# Altium PCB Boost-Shield-V2.PcbDoc
Units mil, origin at the board's own origin, x right, y up, seen from the top; angles counter-clockwise.
Board outline 1250 x 825 mil, 2 copper layers (Top Layer, Bottom Layer); 31 components, 24 nets, 87 pads, 42 vias.
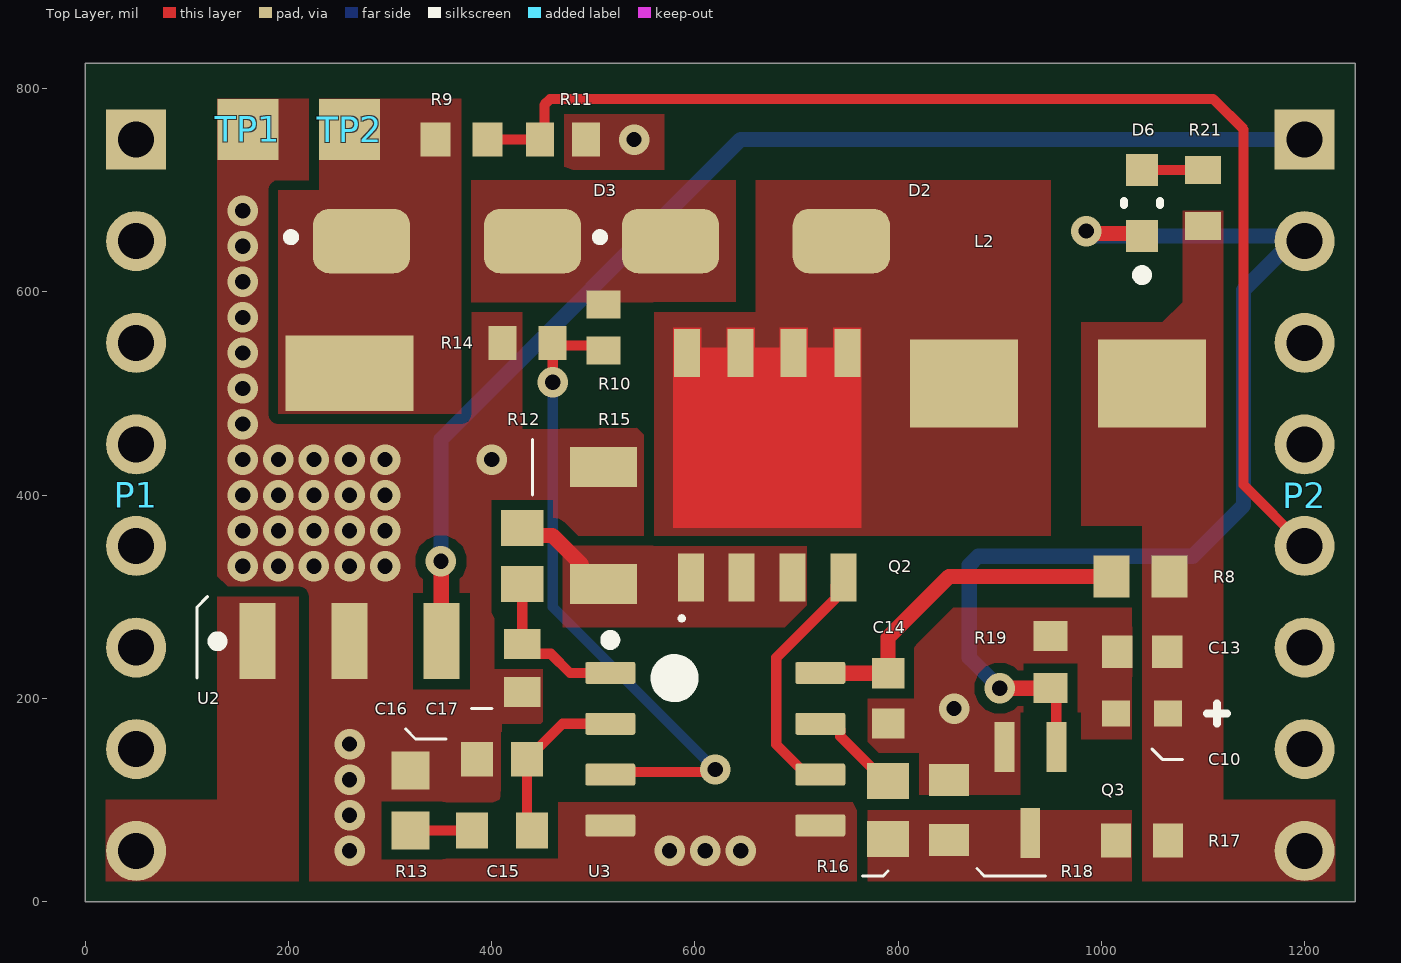
[diagram p0: Top Layer view]
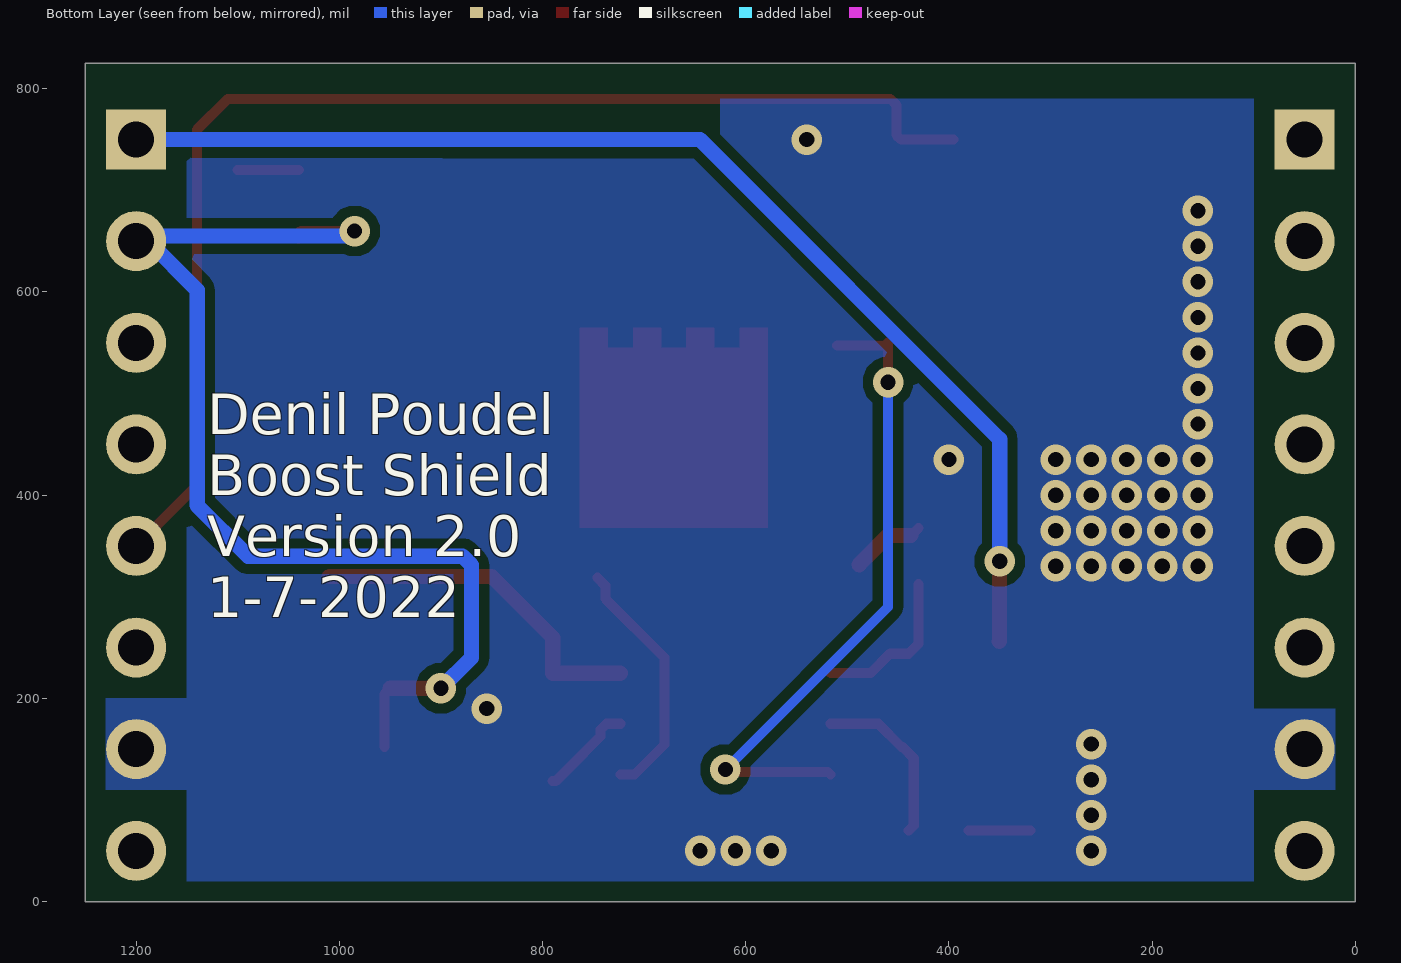
[diagram p1: Bottom Layer view, seen from below]
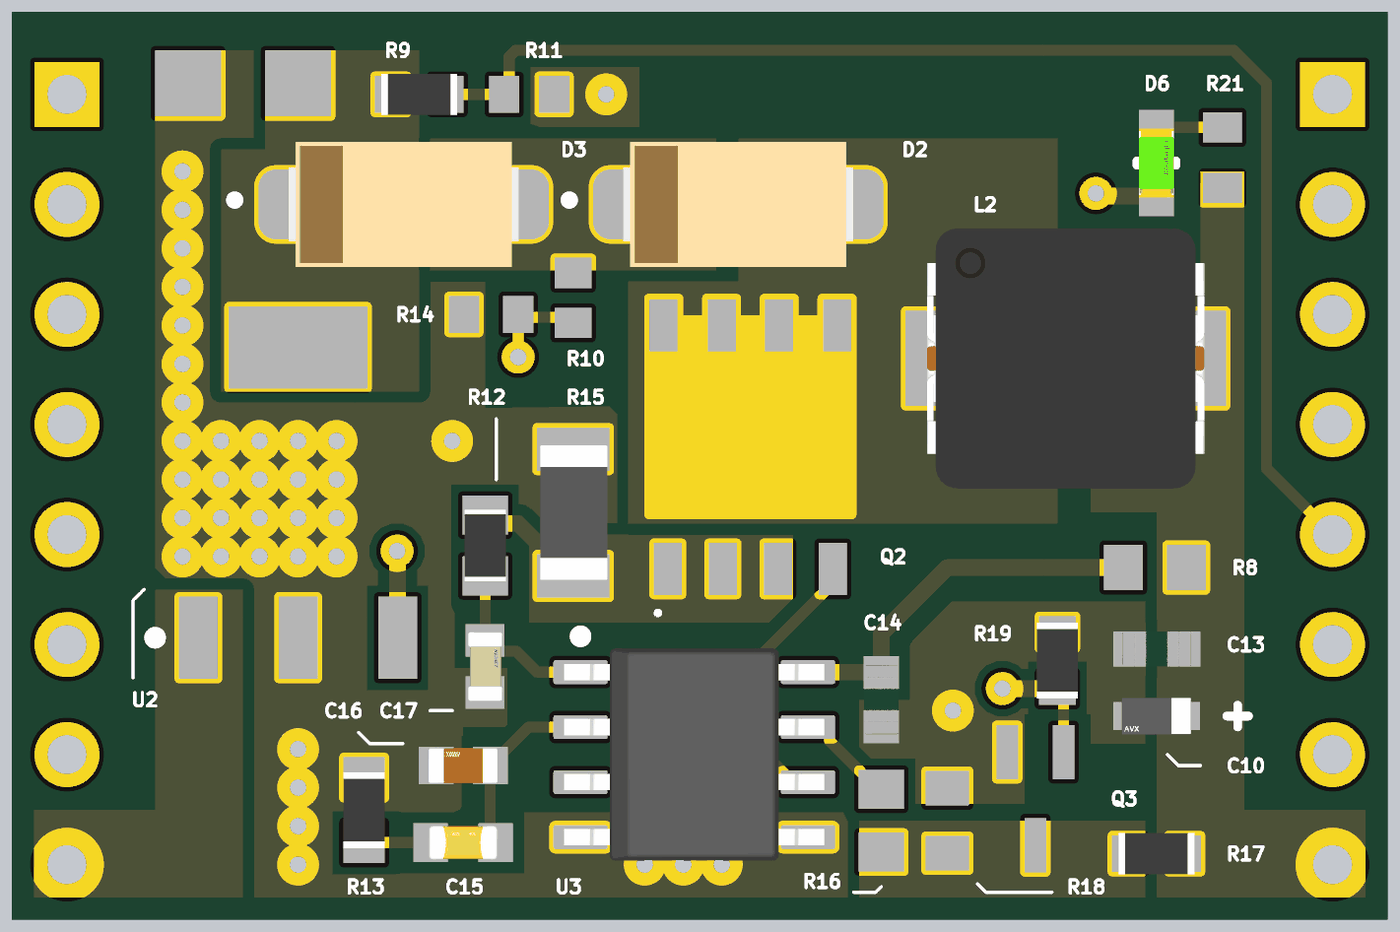
[diagram p2: 3D render of the assembled board from above, using the file's embedded part models]

## Layer stack, top to bottom
Top Solder: solder mask 0.4, Solder Resist, Dk 3.5
Top Layer: signal copper 1.4
Dielectric 1: dielectric 12.6, FR-4, Dk 4.8
Bottom Layer: signal copper 1.4
Bottom Solder: solder mask 0.4, Solder Resist, Dk 3.5

## Board outline
0,0 1250,0 1250,825 0,825

## Design rules (kind name [scope] priority, off if disabled: settings)
BoardOutlineClearance [All] p1: gap=15 ignorepadtopadclearanceinfootprint=FALSE
Clearance [All] p1: gap=10 ignorepadtopadclearanceinfootprint=FALSE except(0: Arc-Hole Track-Hole SMDPad-Hole THPad-Hole Via-Hole Fill-Hole Poly-Hole Region-Hole Text-Hole)
HoleSize [All] p1: absolutevalues=TRUE maxlimit=100 minlimit=10 maxpercent=80.000 minpercent=20.000
HoleToHoleClearance [All] p1: gap=5 allowstackedmicrovias=TRUE
MinimumAnnularRing [All] p1: minimumring=5
MinimumSolderMaskSliver [All] p1: minsoldermaskwidth=9
PolygonConnect [All] p1: connectstyle=Relief reliefconductorwidth=10 reliefentries=4 polygonreliefangle="90 Angle" airgapwidth=10
RoutingVias [All] p1: holewidth=15 width=30 viastyle="Through Hole" minholewidth=13 minwidth=28 maxholewidth=30 maxwidth=60
SolderMaskExpansion [All] p1: expansion=4 istentingtop=FALSE
Width [All] p1: maxlimit=15 minlimit=10 preferedwidth=10
27 further rules are at their usual default settings.

## Components (designator, comment, footprint, x,y, rotation, side; value= is the part's Value field where it differs from the comment)
C10 "47uF" FP-F38M-MFG 1040,185 r0 top
C13 "100nF" FP-CL10-IPC_C 1040.24,245.99 r0 top
C14 "100nF" FP-CL10-IPC_C 790,200 r90 top
C15 "22nF" FP-CC0603-DA-MFG 410,70 r180 top value="22 nF"
C16 "1nF" FP-0603-L_1_6_0_15-W_0_81-IPC_C 410,140 r180 top
C17 "10pF" FP-C0603C-CF-MFG 430,230 r270 top value="10 pF"
D2 "CDBA340L-HF" DIOM5225X250N 660,650 r0 top
D3 "CDBA340L-HF" DIOM5225X250N 355.94,650 r0 top
D6 "APT1608ZGCK" FP-APT1608ZGCK-MFG 1040,687.52 r90 top
L2 "4.7uH" IND_ETQP4M4R7KFN 957.48,510 r180 top
P1 "RH" HDR1X8 50,750 r270 top
P2 "LH" HDR1X8 1200,750 r270 top
Q2 "BSC050NE2LS" INF-PG-TDSON-8-1_V 671,430 r0 top
Q3 "BSS816NW" INF-PG-SOT-323_M 930,110 r270 top
R8 "20Ω" RESC1608X55X30ML15T15 1038.54,320 r0 top
R9 "10kΩ" RESC1609X55X30LL15T15 370,750 r180 top
R10 "33kΩ" RESC1609X50X30LL10T20 510,565 r90 top
R11 "7.5kΩ" RESC1609X50X30LL10T20 470,750 r180 top
R12 "100Ω" RESC1609X50X30ML8T20 430,340 r90 top
R13 "4.7kΩ" RESC1608X55X30NL15T15 320,99.53 r270 top
R14 "3.9kΩ" RESC1608X55X30LL15T15 435.39,550 r0 top
R15 "11mΩ" RESC3115X65N 510,370 r270 top
R16 "27kΩ" RESC1608X55X30ML15T15 790,90 r90 top
R17 "10kΩ" RESC1609X55X30LL15T15 1040,60 r0 top
R18 "DNP" RESC1608X55X25ML10T15 850,90 r270 top
R19 "10kΩ" RESC1609X55X30LL15T15 950,235.59 r270 top
R21 "1K" RESC1608X55X25NL10T15 1100,692.44 r270 top
TP1 "TP" TP 160,760 r0 top
TP2 "TP" TP 260,760 r90 top
U2 "ITS4142N" INF-SOT223_M 260,388.11 r90 top
U3 "LM3478MA/NOPB" D0008A_L 620,150 r0 top

## Footprints (in the part's own frame and the unit in brackets; to place one, negate y for a bottom-side part, rotate by r counter-clockwise, add the part's x,y. Pads: shape width x height; smd on the part's side, far side on the other; paste and mask are expansions set on the pad)
D0008A_L [mm] "SOIC, 8-Leads, Body 5x4mm, Pitch 1.27mm, IPC High Density"
  rrect18% 1.25x0.55 smd: 1(-2.625,1.905) 2(-2.625,0.635) 3(-2.625,-0.635) 4(-2.625,-1.905) 5(2.625,-1.905) 6(2.625,-0.635) 7(2.625,0.635) 8(2.625,1.905)
  silkscreen extent -2.75,1.48 -0.72,2.85, body extent -3,-2.45 3,2.45, height 1.63
DIOM5225X250N [mm]
  rrect50% 2.43x1.61 smd: A(2.135,0) C(-2.135,0)
  silkscreen extent -4,0 -3.8,0.2, body extent -2.65,-1.45 2.65,1.45, height 2.54
FP-0603-L_1_6_0_15-W_0_81-IPC_C [mil]
  rect 31.75x34.18 smd paste+0 mask+0: 1(-24.64,0) 2(24.64,0)
  body extent -44,-23 44,23, height 10
FP-APT1608ZGCK-MFG [mm]
  rect 0.8x0.8 smd paste+0 mask+0: 1(-0.825,0) 2(0.825,0)
  silkscreen extent -1.92,-0.45 0.05,0.45, body extent -1.33,-0.55 1.33,0.55, height 0.25
FP-C0603C-CF-MFG [mm]
  rect 0.75x0.9 smd paste+0 mask+0: 1(-0.6,0) 2(0.6,0)
  body extent -1.2,-0.6 1.2,0.6, height 0.25
FP-CC0603-DA-MFG [mm]
  rect 0.8x0.9 smd paste+0 mask+0: 1(-0.75,0) 2(0.75,0)
  body extent -1.35,-0.75 1.35,0.75, height 0.25
FP-CL10-IPC_C [mil]
  rect 29.85x31.97 smd paste+0 mask+0: 1(-24.68,0) 2(24.68,0)
  body extent -44,-22 44,22, height 10
FP-F38M-MFG [mm]
  rect 0.7x0.65 smd paste+0 mask+0: 1(-0.65,0) 2(0.65,0)
  silkscreen extent 1.63,-0.25 2.12,0.25, body extent -1.1,-0.63 1.1,0.63, height 0.25
HDR1X8 [mm] "Connector; Header; 8 Position"
  rect 1.5x1.5 hole 0.9: 1(0,0)
  round 1.5 hole 0.9: 2(2.54,0) 3(5.08,0) 4(7.62,0) 5(10.16,0) 6(12.7,0) 7(15.24,0) 8(17.78,0)
IND_ETQP4M4R7KFN [mm]
  rect 2.7x2.2 smd: 1(-2.35,0) 2(2.35,0)
  body extent -3.2,-3 3.2,3, height 4.8
INF-PG-SOT-323_M [mm] "SOT3, 3-Leads, Body 2x1.25mm, Pitch 0.65mm, IPC Low Density"
  rect 1.25x0.5 smd: 1(-1.075,0.65) 2(-1.075,-0.65) 3(1.075,0)
  body extent -0.67,-1.1 0.67,1.1, height 1
INF-PG-TDSON-8-1_V [mm] "TDSON, 8-Leads, Body 6.15x5.15mm, Pitch 1.27mm"
  rect 0.65x1.2 smd: 1(-1.905,-2.825) 2(-0.635,-2.825) 3(0.635,-2.825) 4(1.905,-2.825) 5(2.007,2.794) 6(0.66,2.794) 7(-0.66,2.794) 8(-2.007,2.794)
  Top Layer region: 0.315,2.925 1.015,2.925 1.015,3.425 0.315,3.425
  Top Layer region: -1.015,2.925 -0.315,2.925 -0.315,3.425 -1.015,3.425
  Top Layer region: 1.65,2.925 2.35,2.925 2.35,3.425 1.65,3.425
  Top Layer region: -2.35,2.925 -1.65,2.925 -1.65,3.425 -2.35,3.425
  Top Layer region: -2.35,2.925 -2.35,-1.575 2.35,-1.575 2.35,2.925
  silkscreen extent -2.23,-3.94 -2.03,-3.74, body extent -2.58,-3.08 2.58,3.08, height 1
INF-SOT223_M [mm] "SOT223, 4-Leads, Body 6.5x3.5mm, Pitch 2.3mm, IPC Low Density"
  rect 1.9x0.9 smd: 1(-3.35,2.3) 2(-3.35,0) 3(-3.35,-2.3)
  rect 1.9x3.2 smd: 4(3.35,0)
  silkscreen extent -3.47,3.17 -3.23,3.42, body extent -1.85,-3.35 1.85,3.35, height 1.7
RESC1608X55X25ML10T15 [mm] "Chip Resistor, 2-Leads, Body 1.60x0.80mm, IPC Low Density"
  rect 0.8x1 smd: 1(-0.75,0) 2(0.75,0)
  body extent -0.85,-0.45 0.85,0.45, height 0.55
RESC1608X55X25NL10T15 [mm] "Chip Resistor, 2-Leads, Body 1.70x0.90mm, IPC Medium Density"
  rect 0.7x0.9 smd: 1(-0.7,0) 2(0.7,0)
  body extent -0.85,-0.45 0.85,0.45, height 0.55
RESC1608X55X30LL15T15 [mm] "Chip Resistor, 2-Leads, Body 1.60x0.80mm, IPC High Density"
  rect 0.7x0.85 smd: 1(-0.625,0) 2(0.625,0)
  body extent -0.87,-0.48 0.87,0.48, height 0.55
RESC1608X55X30ML15T15 [mm] "Chip Resistor, 2-Leads, Body 1.60x0.80mm, IPC Low Density"
  rect 0.9x1.05 smd: 1(-0.725,0) 2(0.725,0)
  body extent -0.87,-0.48 0.87,0.48, height 0.55
RESC1608X55X30NL15T15 [mm] "Chip Resistor, 2-Leads, Body 1.75x0.95mm, IPC Medium Density"
  rect 0.95x0.95 smd: 1(-0.75,0) 2(0.75,0)
  body extent -0.87,-0.48 0.87,0.48, height 0.55
RESC1609X50X30LL10T20 [mm] "Chip Resistor, 2-Leads, Body 1.55x0.85mm, IPC High Density"
  rect 0.7x0.85 smd: 1(-0.575,0) 2(0.575,0)
  body extent -0.82,-0.48 0.82,0.48, height 0.5
RESC1609X50X30ML8T20 [mm] "Chip Resistor, 2-Leads, Body 1.65x0.95mm, IPC Low Density"
  rect 0.9x1.05 smd: 1(-0.7,0) 2(0.7,0)
  body extent -0.82,-0.48 0.82,0.48, height 0.5
RESC1609X55X30LL15T15 [mm] "Chip Resistor, 2-Leads, Body 1.75x0.95mm, IPC High Density"
  rect 0.75x0.85 smd: 1(-0.65,0) 2(0.65,0)
  body extent -0.87,-0.48 0.87,0.48, height 0.55
RESC3115X65N [mm]
  rect 1x1.68 smd: 1(-1.463,0) 2(1.463,0)
  body extent -1.55,-0.76 1.55,0.79, height 0.65
TP [mil]
  rect 60x60 smd: 1(0,0)

## Part data
C10: library part CMP-04423-000016-1, "CAP TANT POLY 47UF 6.3V SMD  / F380J476MMAAXEH3", Leakage Current=59.2uA, Manufacturer=AVX, Manufacturer Part Number=F380J476MMAAXEH3, Package=F38M, Ripple Current=289mA, Temperature="-55°C to +105°C", Temperature Range High=+105°C, Temperature Range Low=-55°C, Tolerance=20%, Voltage Rating=6.3V, Automotive=No, Capacitance=47uF, Category=Cap, ComponentLink2Description=Datasheet, ComponentLink2URL=http://datasheets.avx.com/F38.pdf, Device Class L1="Passive Components", Device Class L2=Capacitors, Device Class L3="Polymer Capacitors", Digikey Description="CAP TANT POLY 47UF 6.3V SMD", Dissipation Factor=10%, Esr=300mΩ, Footprint Url=http://www.avx.com/download/software/literature/AVX-Footprint-Library.pdf, Height=1mm, Lead Free=Yes, Life=1000Hours, Material=Tantalum-Polymer, Octopart=https://octopart.com/f380j476mmaaxeh3-avx-67040374, RoHS=TRUE
C13 C14: library part CMP-13271-001724-1, "Cap Ceramic 100nF 50V X7R ±20% Pad SMD 0603 +125°C T/R / CL10B104MB8NNNC", Case Code (Imperial)=0603, Case Code (Metric)=1608, Dielectric=X7R, Max Operating Temperature=125°C, Min Operating Temperature=-55°C, Package Quantity=1, Tolerance=20%, Voltage Rating=50V, Capacitance=100nF, Case/Package=0603, Depth=0.8mm, Height=0.8mm, Lead Free="Lead Free", Length=1.6mm, Mount="Surface Mount", Packaging="Tape and Reel", Radiation Hardening=No, Thickness=0.035inch, Voltage Rating (DC)=50V, Width=0.031inch
C15: library part CMP-2100-03602-2, "0603 22 nF 50 V ±10 % Tolerance X7R SMT Multilayer Ceramic Capacitor / CC0603KRX7R9BB223", Capacitance="22 nF", Manufacturer=YAGEO, Manufacturer Part Number=CC0603KRX7R9BB223, Package=CC0603-DA, Temperature="-55°C to +125°C", Temperature Characteristic=X7R, Temperature Coefficient=15%, Temperature Range High=+125°C, Temperature Range Low=-55°C, Tolerance=0.1, Voltage="50 V", Automotive=No, Category=Cap, ComponentLink2Description=Datasheet, ComponentLink2URL=http://www.yageo.com/documents/recent/UPY-GPHC_X7R_6.3V-to-50V_18.pdf, Device Class L1="Passive Components", Device Class L2=Capacitors, Device Class L3="Ceramic Capacitors", Digikey Description="0603 22 nF 50 V ±10 % Tolerance X7R SMT Multilayer Ceramic Capacitor", Footprint Url=http://www.yageo.com/exep/pages/download/literatures/UPY-C_GEN_24.pdf, Height=0.9mm, Lead Free=Yes, Material=Ceramic, Mouser Description="Multilayer Ceramic Capacitors MLCC - SMD/SMT 22nF 50V X7R 10%", Octopart=https://octopart.com/cc0603krx7r9bb223-yageo-41224721, RoHS=TRUE, Voltage Rating="50 V"
C16: library part CMP-2006-02076-2, "CAP CER 10000PF 50V X7R 0603 / 06035C103KAT4A", Capacitance=10nF, Case Code (Imperial)=0603, Case Code (Metric)=1608, Dielectric=X7R, Insulation Resistance=100GR, Max Operating Temperature=125°C, Min Operating Temperature=-55°C, Package Quantity=15000, Tolerance=10%, Voltage=50V, Case/Package=0603, Construction=Flat, Depth=0.81mm, Dissipation Factor=2.5%, Height=0.9mm, Lead Free="Lead Free", Length=1.6mm, Mount="Surface Mount", Number of Pins=2, Packaging="Tape and Reel", Radiation Hardening=No, REACH SVHC="No SVHC", RoHS Compliant=Yes, Series=-, Termination=SMD/SMT, Voltage Rating=50V, Voltage Rating (DC)=50V, Width=0.81mm
C17: library part CMP-2006-03324-2, "CAP CER 10PF 100V 5% NP0 0603 / C0603C100J1GACTU", Capacitance="10 pF", Manufacturer=KEMET, Manufacturer Part Number=C0603C100J1GACTU, Package=C0603C-CF, Temperature="-55°C to +125°C", Temperature Characteristic=C0G, Temperature Coefficient=30ppm/°C, Temperature Range High=+125°C, Temperature Range Low=-55°C, Tolerance=0.05, Voltage Rating="100 V", Automotive=Yes, Automotive Grade="Grade 1", Category=Cap, ComponentLink2Description=Datasheet, ComponentLink2URL=https://api.kemet.com/component-edge/download/datasheet/C0603C100J5GACAUTO.pdf, Device Class L1="Passive Components", Device Class L2=Capacitors, Device Class L3="Ceramic Capacitors", Digikey Description="CAP CER 10PF 100V 5% NP0 0603", Height=0.87mm, Lead Free=Yes, Material=Ceramic, Mouser Description="Multilayer Ceramic Capacitors MLCC - SMD/SMT 100volts 10pF C0G 5%", Octopart=https://octopart.com/c0603c100j1gactu-kemet-109684, RoHS=TRUE
D2 D3: "DIODE SCHOTTKY 40V 3A DO214AC", Average Rectified Current=3A, Manufacturer=Comchip, Max Reverse Voltage (DC)=40V, Package Quantity=5000, Supplier Part Number 1=641-1702-1-ND, Category="Rectifier Diodes", ComponentLink1Description=https://datasheet.ciiva.com/6377/cdba340l-hfrevc514368-6377916.pdf?src-supplier=Digi-Key, ComponentLink1URL=https://datasheet.ciiva.com/6377/cdba340l-hfrevc514368-6377916.pdf?src-supplier=Digi-Key, Manufacturer Part Number=CDBA340L-HF, Mount="Surface Mount", Packaging="Cut Tape", Pricing 1="1=0.60000, 10=0.53100, 100=0.40730, 500=0.32200, 1000=0.25760, 2000=0.23345 (USD)", RoHS=Yes, RoHS Compliant=Yes, Series=-, Stock 1=46445, Supplier 1=Digi-Key
D6: library part CMP-44529-000024-1, "LED GREEN CLEAR CHIP SMD", Case Code (Imperial)=0603, Case Code (Metric)=1608, Color=Green, Forward Current=20mA, Forward Voltage=3.3V, Lens Color=Colorless, Max Operating Temperature=85°C, Min Operating Temperature=-40°C, Package Quantity=1, Case/Package=0603, Dominant Wavelength=525nm, Height=0.75mm, Illumination Color=Green, Lead Free="Lead Free", Length=1.6mm, Lens Transparency=Clear, Luminous Intensity=350mcd, Mount="Surface Mount", Packaging="Tape and Reel", Test Current=20mA, Viewing Angle=120°, Width=0.8mm
L2: library part ETQ-P4M4R7KFN, "Fixed Ind 4.7UH 7.3A 22.77MOHM", Manufacturer=Panasonic, Supplier Part Number 1=P124174CT-ND, Category="Fixed Inductors", Manufacturer Part Number=ETQ-P4M4R7KFN, Pricing 1="1=1.10000, 10=1.02600, 25=0.94720, 50=0.78920, 100=0.74190, 250=0.66296 (USD)", RoHS=No, Stock 1=1000, Supplier 1=Digi-Key
P1 P2: library part "Header 8", "Header, 8-Pin", LatestRevisionDate=17-Jul-2002, LatestRevisionNote="Re-released for DXP Platform.", Publisher="Altium Limited"
Q2: library part CMP-1090-00044-1, "N-Channel OptiMOS Power-MOSFET, 25 V VDS, 58 A ID, -55 to 150 degC, PG-TDSON-8-1, Reel, Green", Manufacturer=Infineon, ComponentLink1Description="Manufacturer URL", ComponentLink1URL=http://www.infineon.com/, ComponentLink2Description=Datasheet, ComponentLink2URL=http://www.infineon.com/dgdl/BSC050NE2LS_Rev+2.1_.pdf?folderId=db3a304326dfb1300126fb3bec803f1a&fileId=db3a304326dfb1300126fb5ce0cb3f2d, ComponentLink3Description="Package Specification", ComponentLink3URL=http://www.infineon.com/cms/packages/SMD_-_Surface_Mounted_Devices/P-PG-TDSON/P-PG-TDSON-08-01x_2x_3.html?__locale=en, DatasheetVersion="Rev. 2.1", Green=TRUE, Halogen-free=TRUE, ID (max)="58Â A", IDpuls (max)="232Â A", Mounting Technology="Surface Mount", PackageDescription="8-Pin Plastic (Green) Thin Dual Small Outline Non-Leaded Package, 5.15 x 5.9 mm Body, 1.27 mm Pitch", PackageReference=PG-TDSON-8-1, Packing=Reel, PartNumber=BSC050NE2LS, Polarity=N, Ptot (max)="28Â W", QG="5Â nC", RDS (on) (max)="5Â mOhm", RDS (on) (max) (@4.5V)="7.1Â mOhm", Rth="4.5Â K/W", RthJA (max)="50Â K/W", RthJC (max)="4.5Â K/W", VDS (max)="25Â V", VGS(th) (max)="2Â V", VGS(th) (min)="1.2Â V"
Q3: library part CMP-1149-00038-1, "N-Channel OptiMOS 2 Small-Signal-Transistor, 20 V VDS, 1.4 A ID, -55 to 150 degC, PG-SOT-323, Reel, Green", Manufacturer=Infineon, ComponentLink1Description="Manufacturer URL", ComponentLink1URL=http://www.infineon.com/, ComponentLink2Description=Datasheet, ComponentLink2URL=http://www.infineon.com/dgdl/BSS816NW_Rev2.3_.pdf?folderId=db3a3043156fd573011622e10b5c1f67&fileId=db3a304335113a6301351e704a2e1332, ComponentLink3Description="Package Specification", ComponentLink3URL=http://www.infineon.com/dgdl/SOT323-Package_Overview.pdf?folderId=db3a30431936bc4b0119533e1dcb3c92&fileId=db3a30431936bc4b011953495f283cb1, DatasheetVersion="Rev. 2.3", Green=TRUE, Halogen-free=TRUE, ID (max)="1.4Â A", IDpuls (max)="5.6Â A", Mounting Technology="Surface Mount", PackageDescription="3-Pin Small Outline Transistor Package, 2 x 1.25 mm Body, 0.65 mm Pitch", PackageReference=PG-SOT-323, PackageVersion=Apr-08, Packing=Reel, PartNumber=BSS816NW, Ptot (max)="0.5Â W", QG="0.6Â nC", RDS (on) (max)="160 mOhm", RDS (on) (max) (@1.8V)="240 mOhm", RDS (on) (max) (@2.5V)="160 mOhm", RthJA (max)="250 K/W", VDS (max)="20 V", VGS(th) (max)="0.75Â V", VGS(th) (min)="0.3Â V"
R8: library part CMP-2000-00739-1, "ERJ-3GEYJ200V", Manufacturer=Panasonic, Part Number=ERJ-3GEYJ200V
R9 R17 R19: library part CMP-1012-00623-3, "Chip Resistor, 10 KOhm, +/- 1%, 0.1 W, -55 to 155 degC, 0603 (1608 Metric), RoHS, Tape and Reel  / ERJ3EKF1002V", Case Code (Imperial)=0603, Case Code (Metric)=1608, Manufacturer=Panasonic, Max Operating Temperature=155degC, Max Power Dissipation=100mW, Min Operating Temperature=-55degC, Package Description="2-Pin Surface Mount Device, Body 1.6 x 0.85 mm", Package Quantity=1, Package Reference=603, Resistance=10KOhm, Temperature Coefficient=100ppm\/degreesC, Tolerance=1%, Voltage Rating=75V, Case\/Package=0603, Composition=ThickFilm, Contact Plating=Tin, Datasheet URL=https://industrial.panasonic.com/cdbs/www-data/pdf/RDA0000/AOA0000C304.pdf, Datasheet Version=02/2017, Depth=0.8mm, Height=0.45mm, Lead Free=LeadFree, Length=1.6mm, Manufacturer URL=http://www.panasonic.com/, Military Standard=Not, Mount=SurfaceMount, Mounting Technology=SurfaceMount, Number of Pins=2, Number of Terminations=2, Packaging=TapeandReel, Power Rating=100mW, Radiation Hardening=No, REACH SVHC=NoSVHC, RoHSCompliant=true, Termination=SMD/SMT, Voltage Rating (DC)=75V, Width=0.031inch
R10: library part CMP-2000-03246-1, "CRCW060333K0JNEA", Manufacturer="Vishay Dale", Part Number=CRCW060333K0JNEA
R11: library part CMP-2000-03583-1, "CRCW06037K50FKEA", Manufacturer="Vishay Dale", Part Number=CRCW06037K50FKEA
R12: library part CMP-2000-03824-5, "Chip Resistor, 100 Ohm, +/- 1%, 100 mW,-55 to 155 degC, 0603 (1608 Metric), RoHS, Tape and Ree / CRCW0603100RFKEA", Manufacturer="Vishay Semiconductor", ComponentLink1Description="Manufacturer URL", ComponentLink1URL=http://www.vishay.com/, ComponentLink2Description=Datasheet, ComponentLink2URL=http://www.vishay.com/docs/20035/dcrcwe3.pdf, DatasheetVersion=06/2012, Mounting Technology="Surface Mount", PackageDescription="2-Pin Surface Mount Device, Body 1.575 x 0.85 mm", PackageReference=0603
R13: library part CMP-1012-00586-3, "Precision Thick Film Chip Resistor, 4.7 KOhm, +/- 1%, -55 to 155 degC, 0603 (1608 Metric), RoHS, Tape and Reel / ERJ-3EKF4701V", Case Code (Imperial)=1206, Case Code (Metric)=3216, Case\Package=1205, Max Operating Temperature="125 degC", Min Operating Temperature="-55 degC", Package Quantity=1, Power Rating="250 mW", Resistance="220 Ohm", Tolerance=5%, Type (Resistor)="Thick Film", Voltage Rating="50 V", ComponentLink1Description="Manufacturer URL", ComponentLink1URL=http://www.panasonic.com/, ComponentLink2Description=Datasheet, ComponentLink2URL=http://industrial.panasonic.com/cdbs/www-data/pdf/RDA0000/AOA0000C86.pdf, DatasheetVersion=Apr-15, Elements=4, Height="0.024 inch", Length="0.126 inch", Mount="Surface Mount", PackageDescription="2-Pin Surface Mount Device, Body 1.6 x 0.85 mm", PackageReference=0603, Packaging="Tape and Reel", Pins=8, Radiation Hardening=No, REACH SVHC="No SVHC", RoHSCompliant=true, Width="0.063 inch"
R14: library part CMP-2000-00783-1, "ERJ-3GEYJ392V", Manufacturer=Panasonic, Part Number=ERJ-3GEYJ392V
R15: library part RLP73V2BR011FTDF, "11 mOhms ±1% 0.5W, 1/2W Chip Resistor 1206 (3216 Metric) Current Sense Thick Film"
R16: library part CMP-2000-00390-1, "ERJ3EKF2702V", Manufacturer=Panasonic, Part Number=ERJ3EKF2702V
R18: library part CMP-2100-03667-1, "Chip Resistor, 0 Ohm, +/- 5%, 0.1 W, -55 to 155 degC, 0603 (1608 Metric), RoHS, Tape and Reel / RC0603JR-070RL", Case Code (Imperial)=0603, Case Code (Metric)=1608, Manufacturer=Yageo, Max Operating Temperature=155degC, Min Operating Temperature=-55degC, Package Description="2-Pin Surface Mount Device, Body 1.6 x 0.8 mm", Package Quantity=5000, Power Rating=100mW, Resistance=0mOhm, Temperature Coefficient=200ppm/degreesC, Tolerance=5%, Voltage Rating=50V, Case/Package=0603, Composition=ThickFilm, Contact Plating=Tin, Datasheet URL=http://www.yageo.com/NewPortal/yageodocoutput?fileName=/pdf/R-Chip/PYu-RC_Group_51_RoHS_L_5.pdf, Datasheet Version="Rev. 5, 10/2016", Depth=0.8mm, Height=0.45mm, Lead Free=LeadFree, Length=1.6mm, Manufacturer URL=http://www.yageo.com/, Military Standard=Not, Number of Pins=2, Package Reference=0603, Packaging=TapeandReel, Radiation Hardening=No, REACH SVHC=NoSVHC, RoHSCompliant=true, Termination=SMD/SMT, Voltage Rating (DC)=50V, Width=0.8mm
R21: library part CMP-1659-00009-4, "Chip Resistor, 1 KOhm, +/-1%, 0.1 W, -55 to 155 degC, 0603 (1608 Metric), RoHS, Tape and Reel", Manufacturer=Yageo, Max Operating Temperature="155 degC", Min Operating Temperature="-55 degC", Package Quantity=200, Voltage Rating="50 V", ComponentLink1Description="Manufacturer URL", ComponentLink1URL=http://www.yageo.com/, ComponentLink2Description=Datasheet, ComponentLink2URL=http://www.yageo.com/documents/recent/PYu-RC_Group_51_RoHS_L_04.pdf, ComponentLink3Description="Package Specification", ComponentLink3URL=http://www.farnell.com/datasheets/443971.pdf, DatasheetVersion="Rev. 4, 02/2016", Height="0.45 mm", Length="1.6 mm", Mount="Surface Mount", Mounting Technology="Surface Mount", PackageDescription="2-Pin Surface Mount Device, Body 1.6 x 0.8 mm", PackageReference=0603, Packaging="Tape and Reel", Pins=2, REACH SVHC="No SVHC", RoHSCompliant=true
U2: library part CMP-1095-00140-1, "Smart High-Side Power Switch for Industrial Applications 1 Channel: 1 x 200 mOhm, 12 to 45 V Operating, -30 to 85 degC, SOT223, Reel, Green", Load Current (typ)="1.4Â A", Manufacturer=Infineon, Operating Voltage Range (max)="45 V", Operating Voltage Range (min)="12 V", Channels=1, ComponentLink1Description="Manufacturer URL", ComponentLink1URL=http://www.infineon.com/, ComponentLink2Description=Datasheet, ComponentLink2URL=http://www.infineon.com/dgdl/ITS4142N_20060309.pdf?folderId=db3a304412b407950112b408e8c90004&fileId=db3a304412b407950112b4296b0840e1, ComponentLink3Description="Package Specification", ComponentLink3URL=http://www.infineon.com/dgdl/SOT223-Package_Overview.pdf?folderId=db3a30431936bc4b0119530470b03c3d&fileId=db3a30431936bc4b0119531d40b93c5c, Green=TRUE, IL (nom)min - all channels active="1.4Â A", IL (nom)min - one channel active="1.4Â A", IL (SC)="3 A", IL (SCp)="4.5Â A", Mounting Technology="Surface Mount", PackageDescription="4-Pin Small Outline Transistor Package, 6.5 x 3.5 mm Body, 2.3 mm Pitch", PackageReference=SOT223, PackageVersion=Apr-08, Packing=Reel, PartNumber=ITS4142N, Ptot (max)="1.4Â W", RON (max) @ Tj max="320 mOhm", RON @ 25 degC="200 mOhm (max)", toff (max)="150 us", ton (max)="100 us"
U3: library part CMP-0063-01437-3, "High Efficiency Low-Side N-Channel Controller for Switching Regulator, 8-pin Narrow SOIC, 1000 Reel", Manufacturer="Texas Instruments", PackageTopMarking=NSZXTT*L3478*MA, PowerWise=N, Code_IPC=SOIC127P600-8, Code_JEDEC=MS-012-AA, ComponentLink1Description="Datasheet URL", ComponentLink1URL=http://www.ti.com/general/docs/lit/getliterature.tsp?genericPartNumber=LM3478&fileType=pdf, CompType=MiscPower, High-Reliability=Y, PackageDescription="SOIC Narrow, 4.9 x 3.9 x 1.45mm, 8 Lead, 1.27mm Pitch", PackageReference=D0008A, PartNumber=LM3478MA/NOPB, PinCount=8, RoHS=Y

## Via types
v1: diameter 30, hole 15, Top Layer to Bottom Layer, 42 vias

## Nets (pads, with @x,y where several pads share a name; then routed paths per layer and width w, separated by ;. In a path a pad name is that pad's centre, name@x,y a point inside that pad or via, vN(x,y) a via of type N, cw(c..) or ccw(c..) an arc to the next point about the centre after c; other vN are vias at no path point)
3.3V: P1.6
ADC: P2.5 R9.1 R11.2 | length 1225.7
  Top Layer w10: R9.1 R11.2 451.73,754.37 451.73,784.14 457.59,790 1110,790 1140,760 1140,410 P2.5
CAP: D3.C R9.2 TP2.1 U2.4
COMP: C15.1 C16.1 U3.2 | length 169.2
  Top Layer w10: C15.1 434.64,74.89 434.64,141.21 445.52,152.09 446.73,152.09 469.64,175 U3.2
DRAIN: D2.A L2.2 Q2.5 Q2.6 Q2.7 Q2.8
ENABLE: P2.1 U2.3 | length 1171.2
  Top Layer w15: v1(350,335) 350.28,334.72 350.28,256.5 U2.3
  Bottom Layer w15: v1(350,335) 350,455 645,750 P2.1
FEEDBACK: R10.1 R14.2 U3.3 | length 642.8
  Top Layer w10: v1(460,511.22) R14.2 462.64,547.36 R10.1@510,547.36 ; U3.3 519.15,127.5 617.5,127.5 v1(620,130)
  Bottom Layer w10: v1(460,511.22) 460,290 v1(620,130)
FS: R16.2 U3.7 | length 93.9
  Top Layer w10: U3.7 737.13,175 742.95,169.17 742.95,162.64 774.33,131.26 787.05,118.54 R16.2
GATE: Q2.4 U3.6 | length 247.1
  Top Layer w10: U3.6 709.57,125 680,154.57 680,240 738.2,298.2 738.2,310.98 Q2.4
GND: C10.1 C13.1 C14.1 C16.2 C17.2 P1.7 P2.7 Q3.2 R11.1 R13.1 R14.1 R15.1 R18.1 R19.1 TP1.1 U2.2 U3.4 U3.5
  other v1: 260,50 575,50 610,50 645,50 260,85 260,120 260,155 855,190 155,330 190,330 225,330 260,330 295,330 155,365 190,365 225,365 260,365 295,365 155,400 190,400 225,400 260,400 295,400 155,435 190,435 225,435 260,435 295,435 400,435 155,470 155,505 155,540 155,575 155,610 155,645 155,680 540,750
NetC6_2: 
NetC15_2: C15.2 R13.2 | length 60.5
  Top Layer w10: R13.2 C15.2
NetC19_2: 
NetD6_2: D6.2 R21.1 | length 60
  Top Layer w10: D6.2 R21.1
NetQ1_4: 
NetQ3_3: Q3.3 R16.1 R17.1 R18.2
NetQ4_4: 
SD: D6.1 P2.2 Q3.1 R19.2 | length 1106
  Top Layer w10: R19.2 955.59,204.41 Q3.1
  Top Layer w15: v1(900,210) R19.2 ; v1(985,660) 987.48,657.52 1037.52,657.52 D6.1
  Bottom Layer w15: v1(900,210) 870,240 870,331.21 878.79,340 1090,340 1140,390 1140,601.92 1188.08,650 P2.2 1195,655 990,655 v1(985,660)
SENSE: C17.1 R12.1 U3.1 | length 157.3
  Top Layer w10: R12.1 C17.1 439.76,243.86 458.19,243.86 477.05,225 U3.1
SOURCE: Q2.1 Q2.2 Q2.3 R12.2 R15.2 | length 73.3
  Top Layer w10: R12.2 R12.2@437.37,360.19
  Top Layer w15: R12.2@437.37,360.19 459.81,360.19 R15.2@488.4,331.6
VBAT: C10.2 C13.2 L2.1 P2.8 R8.2 R17.2 R21.2
VIN: C14.2 R8.1 U3.8 | length 347
  Top Layer w15: U3.8 723.5,224.84 789.84,224.84 C14.2 790,260 850,320 R8.1
VM: P1.8 U2.1
VOUT: D2.C D3.A R10.2
pads on no net: P1.1 P1.2 P1.3 P1.4 P1.5 P2.3 P2.4 P2.6

## Polygon pours and split planes (outlines as drawn)
GND on Top Layer "GND_L01_P016" (solid, pour order 16): 450,176.99 448.01,175 410,175 410,101.5 406.22,97.72 755.09,97.72 757.39,100.02 759.33,98.09 759.33,33.74 759.33,20 20,20 20,100 130,100 130,790 570,790 570,710 430,710 430,465 550.05,466.59 551.49,465.14 551.49,260 450,260
VBAT on Top Layer "VBAT_L01_P008" (solid, pour order 8): 1120,680 1080,680 1080,590 1060,570 980,570 980,370 1040,370 1040,20 1230,20 1230,100 1120,100
GND on Top Layer "GND_L01_P018" (solid, pour order 18): 920,186.47 980,186.47 980,160 1035,160 1035,284.33 1040,289.33 854.33,289.33 770,205 770,152.32 770,105 920,105
NetQ3_3 on Top Layer "NETQ3_3_L01_P019" (solid, pour order 19): 770,90 1030,90 1030,20 770,20
VM on Top Layer "VM_L01_P011" (solid, pour order 11): 130,300 210,300 210,20 20,20 20,100 130,100
CAP on Top Layer "CAP_L01_P006" (solid, pour order 6): 230,790 370,790 370,480 190,480 190,700 230,700
VOUT on Top Layer "VOUT_L01_P004" (solid, pour order 4): 380,710 640,710 640,590 380,590
SOURCE on Top Layer "SOURCE_L01_P003" (solid, pour order 3): 470,350 710,350 710,270 470,270
DRAIN on Top Layer "DRAIN_L01_P000" (solid, pour order 0): 560,580 660,580 660,710 950,710 950,360 560,360
GND on Bottom Layer "GND_L02_P017" (solid, pour order 17): 625,790 625,730.97 1150,732.16 1150,200 1230,200 1230,110 1150,110 1150,20 100,20 100,110 20,110 20,190 100,190 100,790

## Silkscreen, mask and mechanical layers (free items; w line width, h text height)
Top Overlay:
  lines w3: 110,220 110,290 120,300 ; 315,170 325,160 355,160 ; 380,190 400,190 ; 440,400 440,455 ; 765,25 785,25 790,30 ; 877.5,32.5 885,25 945,25 ; 1050,150 1060,140 1080,140
Bottom Overlay:
  text "Denil Poudel / Boost Shield / Version 2.0 / 1-7-2022" at 1129.89,280 h40
Mechanical 1:
  the board outline again, w3